# Altium PCB DE-2506241.PcbDoc
Units mm, origin at the board's own origin, x right, y up, seen from the top; angles counter-clockwise.
Board outline 75 x 75 mm, 2 copper layers (Top Layer, Bottom Layer); 68 components, 45 nets, 184 pads, 5 vias.
Unrouted connection lines stored in the file: 49.
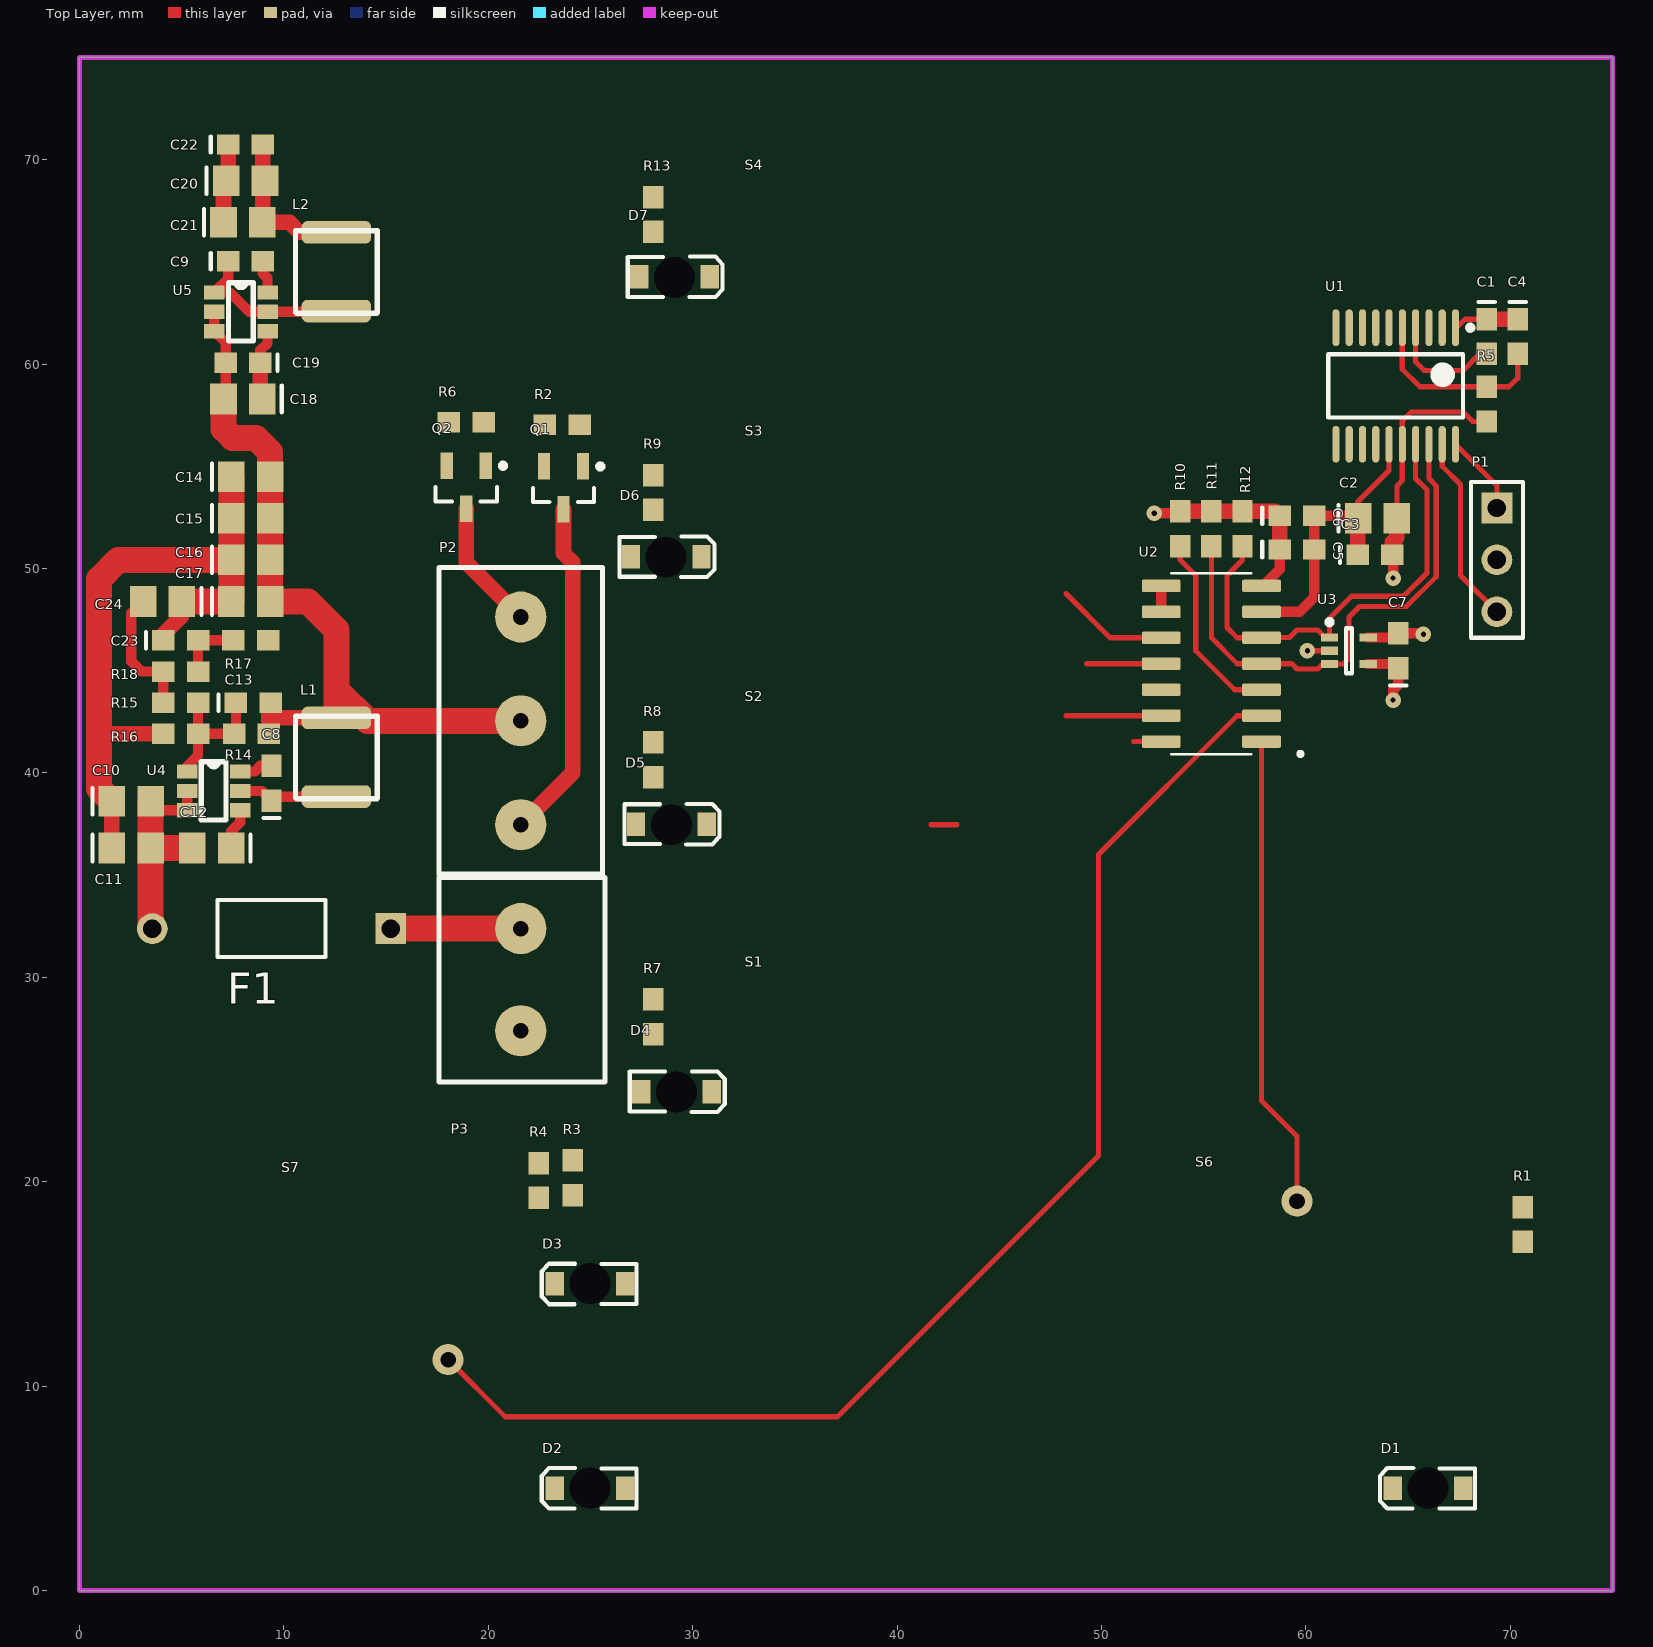
[diagram p0: Top Layer view]
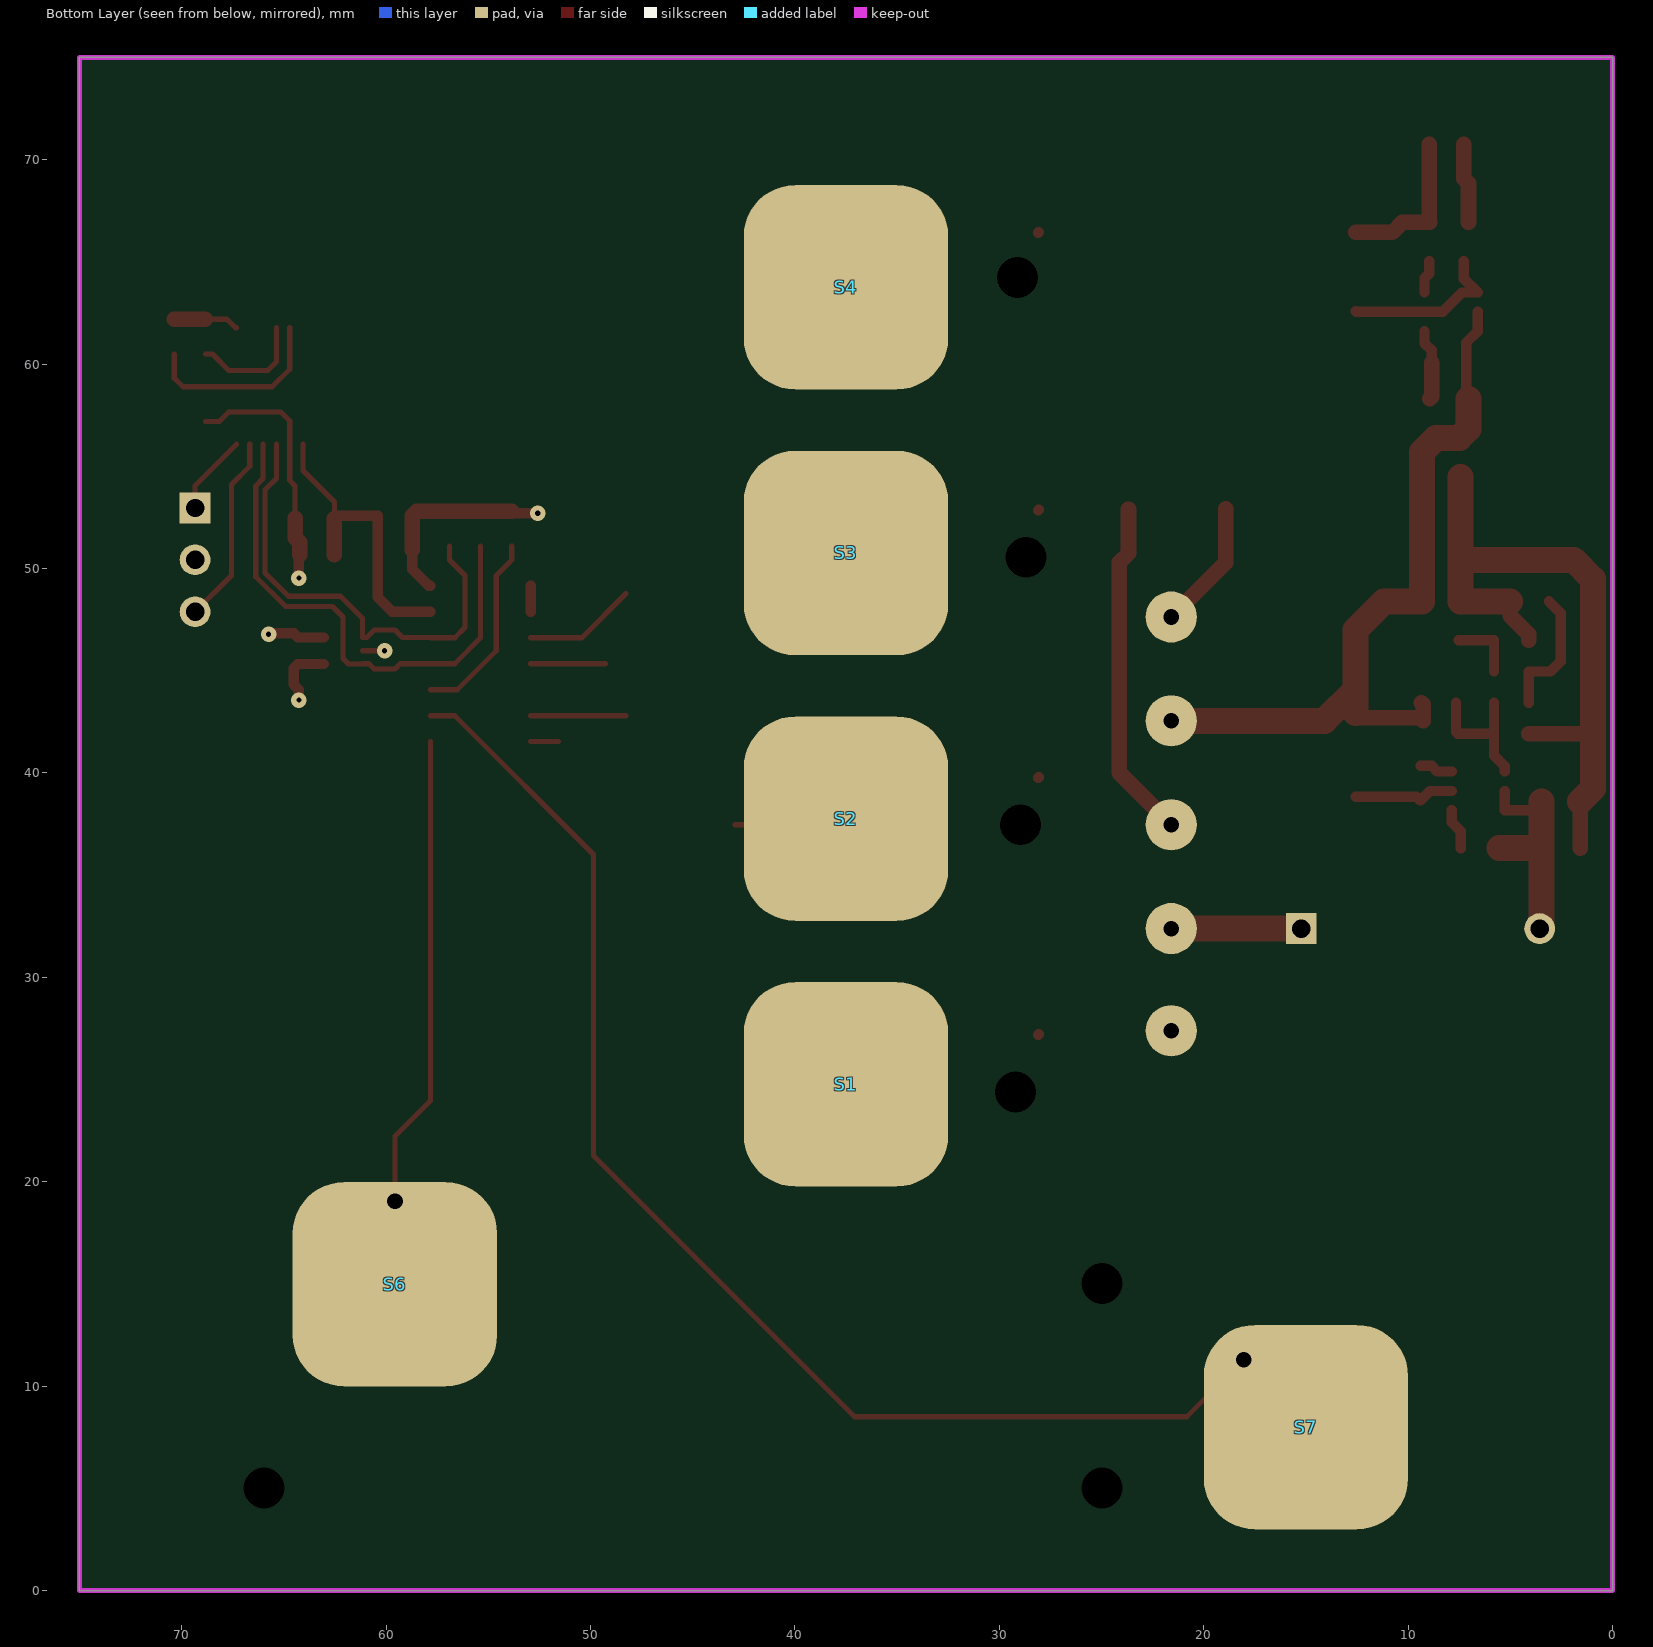
[diagram p1: Bottom Layer view, seen from below]

## Layer stack, top to bottom
Top Solder: solder mask 0.0102, Solder Resist, Dk 3.5
Top Layer: signal copper 0.0356
Dielectric 1: dielectric 0.32, FR-4, Dk 4.8
Bottom Layer: signal copper 0.0356
Bottom Solder: solder mask 0.0102, Solder Resist, Dk 3.5

## Board outline
0,0 0,75 75,75 75,0

## Design rules (kind name [scope] priority, off if disabled: settings)
Clearance [All] p1: gap=0.254 ignorepadtopadclearanceinfootprint=FALSE except(0: Arc-Hole Track-Hole SMDPad-Hole THPad-Hole Via-Hole Fill-Hole Poly-Hole Region-Hole Text-Hole; 0.203: Arc-Arc Arc-Track Arc-SMDPad Track-Track Track-SMDPad SMDPad-SMDPad)
PolygonConnect [All] p1: connectstyle=Relief reliefconductorwidth=0.254 reliefentries=4 polygonreliefangle="90 Angle" airgapwidth=0.254
RoutingVias [All] p1: holewidth=0.711 width=1.27 viastyle="Through Hole" minholewidth=0.711 minwidth=1.27 maxholewidth=0.711 maxwidth=1.27
SolderMaskExpansion [All] p1: expansion=0.102
Width [All] p1: maxlimit=2.54 minlimit=0.254 preferedwidth=0.508
30 further rules are at their usual default settings.

## Components (designator, comment, footprint, x,y, rotation, side; value= is the part's Value field where it differs from the comment)
C1 "C0603" 0603 68.834,61.341 r270 top value=100nF
C2 "C0805" 0805 63.5,52.451 r0 top value=10uF
C3 "C0603" 0603 63.373,50.673 r0 top value=100nF
C4 "C0603" 0603 70.358,61.341 r270 top value=100nF
C5 "C0603" 0603 59.563,50.927 r0 top value=1uF
C6 "C0603" 0603 59.563,52.578 r0 top value=100nF
C7 "C0603" 0603 64.516,45.974 r90 top value=100nF
C8 "100nF" 0603 9.398,39.497 r90 top
C9 "100nF" 0603 8.128,65.024 r0 top
C10 "C0805" 0805 2.54,38.608 r0 top value=22uF
C11 "C0805" 0805 2.54,36.322 r0 top value=22uF
C12 "C0805" 0805 6.477,36.322 r180 top value=22uF
C13 "C0603" 0603 8.509,43.434 r0 top value=100pF
C14 "C0805" 0805 8.382,54.483 r0 top value=22uF
C15 "C0805" 0805 8.382,52.451 r0 top value=22uF
C16 "C0805" 0805 8.382,50.419 r0 top value=22uF
C17 "C0805" 0805 8.382,48.387 r0 top value=22uF
C18 "C0805" 0805 8.001,58.293 r180 top value=22uF
C19 "C0603" 0603 8.001,60.071 r180 top value=100nF
C20 "C0805" 0805 8.128,68.961 r0 top value=22uF
C21 "C0805" 0805 8.001,66.929 r0 top value=22uF
C22 "C0603" 0603 8.128,70.739 r0 top value=100nF
C23 "C0603" 0603 4.953,46.482 r0 top value=100nF
C24 "C0805" 0805 4.064,48.387 r180 top value=10uF
D1 "LED_ON_OFF" "LED sa rupom" 66,5 r180 top locked
D2 "LED_HREC" "LED sa rupom" 25,5 r180 top locked
D3 "LED_VENT" "LED sa rupom" 25,15 r180 top locked
D4 "LED_SPEED_4" "LED sa rupom" 29.185,24.409 r0 top
D5 "LED_SPEED_3" "LED sa rupom" 28.931,37.49 r0 top
D6 "LED_SPEED_2" "LED sa rupom" 28.677,50.571 r0 top
D7 "LED_SPEED_1" "LED sa rupom" 29.083,64.262 r0 top
F1 "Fuse Thermal" PIN-W2/E2.8 9.398,32.385 r180 top
L1 "ASPI-4030S" ASPI-4030S 12.573,40.767 r180 top
L2 "ASPI-4030S" ASPI-4030S 12.573,64.516 r180 top
P1 "ICSP" HDR1X3 69.342,52.959 r270 top
P2 "RS485" "TERMINAL BLOK 3" 21.59,42.545 r0 top
P3 "DC_IN" "TERMINAL BLOK 2" 21.59,29.885 r0 top
Q1 "BSS123" SOT23_N 23.683,53.941 r270 top
Q2 "BSS123" SOT23_N 18.923,53.975 r270 top
R1 "470R" ERA-0603 70.612,17.907 r270 top
R2 "10K" ERA-0603 23.622,57.023 r0 top
R3 "470R" ERA-0603 24.13,20.193 r270 top
R4 "470R" ERA-0603 22.479,20.066 r270 top
R5 "10R" ERA-0603 68.834,58.039 r90 top
R6 "10K" ERA-0603 18.923,57.15 r0 top
R7 "470R" ERA-0603 28.067,28.067 r270 top
R8 "470R" ERA-0603 28.067,40.64 r270 top
R9 "470R" ERA-0603 28.067,53.721 r270 top
R10 "10K" ERA-0603 53.848,51.943 r90 top
R11 "10K" ERA-0603 55.372,51.943 r90 top
R12 "10K" ERA-0603 56.896,51.943 r90 top
R13 "470R" ERA-0603 28.067,67.31 r270 top
R14 "NF" ERA-0603 8.421,41.91 r180 top
R15 "NF" ERA-0603 4.953,43.434 r180 top
R16 "NF" ERA-0603 4.953,41.91 r0 top
R17 "1K" ERA-0603 8.382,46.482 r180 top
R18 "10K" ERA-0603 4.953,44.958 r180 top
S1 "SENS_SPEED_1" SENSOR_PAD#1 38.862,24.765 r0 top
S2 "SENS_SPEED_2" SENSOR_PAD#2 37.719,37.98 r0 top
S3 "SENS_SPEED_3" SENSOR_PAD#1 38.862,50.758 r0 top
S4 "SENS_SPEED_4" SENSOR_PAD#3 38.608,63.754 r0 top
S6 "SENS_ON_OFF" SENSOR_PAD#4 59.563,14.986 r0 top
S7 "SENS_MODE" SENSOR_PAD#5 14.859,14.732 r0 top
U1 "STM32F030F4P6" STM-TSSOP20_N 64.389,58.928 r270 top
U2 "CAP1298" SOIC14 55.372,45.339 r180 top
U3 "24FC01T-I/OT" SC70-LT5_N 62.103,45.974 r0 top
U4 "AP63200" TSOT-26 5.274,40.066 r0 top
U5 "AP63203" TSOT-26 6.604,63.5 r0 top

## Footprints (in the part's own frame and the unit in brackets; to place one, negate y for a bottom-side part, rotate by r counter-clockwise, add the part's x,y. Pads: shape width x height; smd on the part's side, far side on the other; paste and mask are expansions set on the pad)
0603 [mm] "Chip Capacitor; Body 1.6 x 0.8 mm (LxW typ)"
  rect 1.1x1 smd: 1(-0.85,0) 2(0.85,0)
  silkscreen extent -1.7,-0.4 -1.7,0.4
0805 [mm] "Chip Capacitor; Body 2.0 x 1.2 mm (LxW typ)"
  rect 1.3x1.5 smd: 1(-0.95,0) 2(0.95,0)
  silkscreen extent -1.9,-0.65 -1.9,0.65
ASPI-4030S [mm] "SMD Inductor ASPI-4030S"
  rrect50% 3.4x1.1 smd: 1(0,1.925) 2(0,-1.925)
  silkscreen extent -2.01,-2.01 2,2.03, body extent -2.11,-2.13 2.11,2.16, height 3
ERA-0603 [mm] "Chip Resistor; Body 1.6 x 0.8 mm (LxW typ)"
  rect 1.1x1 smd: 1(-0.85,0) 2(0.85,0)
HDR1X3 [mm] "Connector; Header; 3 Position"
  rect 1.5x1.5 hole 0.9: 1(0,0)
  round 1.5 hole 0.9: 2(2.54,0) 3(5.08,0)
  silkscreen extent -1.27,-1.27 6.35,1.27
"LED sa rupom" [mm] "SM LED; 2 Flat Leads"
  rect 0.9x1.15 smd: 1(-1.702,0) 2(1.753,0)
  round 0 hole 2: ""(0.025,-0.025)
  silkscreen extent -2.26,-0.99 2.38,0.99
PIN-W2/E2.8 [mm] "Thru-Hole; 2 Leads"
  rect 1.5x1.5 hole 0.9: 1(-5.825,0)
  round 1.5 hole 0.9: 2(5.825,0)
  silkscreen extent -2.65,-1.4 2.65,1.4
SC70-LT5_N [mm] "SOT353, 5-Leads, Body 2x1.3mm, Pitch 0.65mm, Lead Span 2.1mm, IPC Medium Density"
  rect 0.85x0.4 smd: 1(-0.95,0.65) 2(-0.95,0) 3(-0.95,-0.65) 4(0.95,-0.65) 5(0.95,0.65)
  silkscreen extent -1.07,-1.1 0.15,1.52, body extent -0.7,-1.1 0.7,1.1, height 1.1
SENSOR_PAD#1 [mm] "pcb trace touch sensor pad"
  rrect50% 10x10 smd far side: 1(-1.362,0)
SENSOR_PAD#2 [mm] "pcb trace touch sensor pad"
  rrect50% 10x10 smd far side: 1(-0.219,-0.219)
SENSOR_PAD#3 [mm] "pcb trace touch sensor pad"
  rrect50% 10x10 smd far side: 1(-1.108,0)
SENSOR_PAD#4 [mm] "pcb trace touch sensor pad"
  rrect50% 10x10 smd far side: 1(0,0)
SENSOR_PAD#5 [mm] "pcb trace touch sensor pad"
  rrect50% 10x10 smd far side: 1(0.141,-6.732)
SOIC14 [mm]
  rrect25% 1.9x0.6 smd: 1(-2.455,3.81) 2(-2.455,2.54) 3(-2.455,1.27) 4(-2.455,0) 5(-2.455,-1.27) 6(-2.455,-2.54) 7(-2.455,-3.81) 8(2.455,-3.81) 9(2.455,-2.54) 10(2.455,-1.27) 11(2.455,0) 12(2.455,1.27) 13(2.455,2.54) 14(2.455,3.81)
  silkscreen extent -4.45,-4.43 1.95,4.51, body extent -3,-4.33 3,4.33, height 1.75
SOT23_N [mm] "SOT23, 3-Leads, Body 2.9x1.3mm, Pitch 0.95mm, Lead Span 2.3mm, IPC Medium Density"
  rect 1.3x0.6 smd: 1(-1.05,0.95) 2(-1.05,-0.95) 3(1.05,0)
  silkscreen extent -1.17,-1.5 0.7,1.93, body extent -0.7,-1.5 0.7,1.5, height 1.1
STM-TSSOP20_N [mm] "SOP, 20-Leads, Body 6.6x4.5mm, Pitch 0.65mm, IPC Medium Density"
  oval 1.8x0.35 smd: 1(-2.85,2.925) 2(-2.85,2.275) 3(-2.85,1.625) 4(-2.85,0.975) 5(-2.85,0.325) 6(-2.85,-0.325) 7(-2.85,-0.975) 8(-2.85,-1.625) 9(-2.85,-2.275) 10(-2.85,-2.925) 11(2.85,-2.925) 12(2.85,-2.275) 13(2.85,-1.625) 14(2.85,-0.975) 15(2.85,-0.325) 16(2.85,0.325) 17(2.85,0.975) 18(2.85,1.625) 19(2.85,2.275) 20(2.85,2.925)
  silkscreen extent -2.97,-3.3 1.55,3.78, body extent -2.25,-3.3 2.25,3.3, height 1.2
"TERMINAL BLOK 2" [mm] "Terminal blok 3,5mm"
  round 2.5 hole 0.762: 1(0,-2.5) 2(0,2.5)
  silkscreen extent -4,-5 4.13,5
"TERMINAL BLOK 3" [mm] "Terminal blok konektor 3 pina"
  round 2.5 hole 0.762: 1(0,5.08) 2(0,0) 3(0,-5.08)
  silkscreen extent -4,-7.5 4,7.5
TSOT-26 [mm]
  rect 1x0.7 smd: 1(0,0) 2(0,-0.95) 3(0,-1.9) 4(2.6,-1.9) 5(2.6,-0.95) 6(2.6,0)
  silkscreen extent 0.69,-2.38 1.91,0.48, body extent 0.53,-2.51 2.03,0.61, height 1

## Part data
C1 C2 C3 C4 C5 C6 C7 C10 C11 C12 C13 C14 C15 C16 C17 C18 C19 C20 C21 C22 C23 C24: "Ceramic Chip Capacitor - Standard", PackageDocument=Mar-2001, ComponentLink1Description="Manufacturer Link", ComponentLink1URL=http://www.kemet.com/, ComponentLink2Description=Datasheet, ComponentLink2URL=http://www.kemet.com/kemet/web/homepage/kechome.nsf/vapubfilesname/F3102TA.pdf/$file/F3102TA.pdf, DatasheetDocument=Mar-2001, LatestRevisionDate=19-Mar-2004, LatestRevisionNote="Silkscreen size reduced.", Note="Footprint corresponds to dimensions for bulk cassette packaging. This case size has tightened tolerances.", Published=17-Jul-2002, Publisher="Altium Limited"
  C1 C3 C4 C5 C6 C7 C13 C19 C22 C23: Code_IPC="1608 [0603]", Code_JEITA=0603, PackageReference=0603
  C2 C10 C11 C12 C14 C15 C16 C17 C18 C20 C21 C24: Code_IPC=2012[0805], Code_JEITA=0805, PackageReference=0805
C8 C9: library part C0603, "Ceramic Chip Capacitor - Standard", PackageDocument=Mar-2001, Code_IPC="1608 [0603]", Code_JEITA=0603, ComponentLink1Description="Manufacturer Link", ComponentLink1URL=http://www.kemet.com/, ComponentLink2Description=Datasheet, ComponentLink2URL=http://www.kemet.com/kemet/web/homepage/kechome.nsf/vapubfilesname/F3102TA.pdf/$file/F3102TA.pdf, DatasheetDocument=Mar-2001, LatestRevisionDate=19-Mar-2004, LatestRevisionNote="Silkscreen size reduced.", Note="Footprint corresponds to dimensions for bulk cassette packaging. This case size has tightened tolerances.", PackageReference=0603, Published=17-Jul-2002, Publisher="Altium Limited"
D1 D2 D3 D4 D5 D6 D7: library part HSMC-C540-F0001, "Top Mount AS AlInGaP Red Oval Lens High Brightness", LED_Colour=Red, PackageDocument=30-Apr-2002, ComponentLink1Description="Manufacturer Link", ComponentLink1URL=http://www.agilent.com/, ComponentLink2Description=Datasheet, ComponentLink2URL=http://cp.literature.agilent.com/litweb/pdf/5988-5794EN.pdf, DatasheetDocument=7-Mar-2002, LuminousIntensity="96mcd (Minimum).", PackageReference=2.0X1.25X1.2, PCB_Layout="Complies with manufacturer's recommendation.", Published=11-Dec-2002, Publisher="Altium Limited"
F1: "Thermal Fuse", LatestRevisionDate=17-Jul-2002, LatestRevisionNote="Re-released for DXP Platform.", PackageDescription="Thru-Hole; 2 Leads", PackageReference=PIN-W2/E2.8, Published=24-Mar-1999, Publisher="Altium Limited"
L1 L2: "Wire Wound Magnetically Shielded SMD Power Inductor", Code_IEC=1005, Code_JEITA=0402, LatestRevisionDate=29-May-2009, LatestRevisionNote="IPC-7351 Footprint Added.", PackageDescription="Chip Inductor", PackageReference=0402-A, Published=8-Jun-2000, Publisher="Altium Limited"
P1: library part "Header 3", "Header, 3-Pin", LatestRevisionDate=17-Jul-2002, LatestRevisionNote="Re-released for DXP Platform.", Publisher="Altium Limited"
P2: library part "TERMINAL BLOK 3", "3 pinski terminal blok konektor"
P3: library part "TERMINAL BLOK 2", "Terminal blok konektor 3,5 mm"
Q1 Q2: "N-channel Enhancement Mode Vertical D-MOSFET", ComponentLink1Description="Manufacturer Link", ComponentLink1URL=http://www.semiconductors.philips.com/, ComponentLink2Description=Datasheet, ComponentLink2URL=http://www.semiconductors.philips.com/acrobat/datasheets/BSS123_3.pdf, DatasheetVersion=Apr-1995, LatestRevisionDate=12-Dec-2006, LatestRevisionNote="IPC-7351 Footprint Added.", PackageDescription="3-Pin SOT-23 Package 0.95 mm Pitch, 2.3 mm Lead Span", PackageReference=SOT23, PackageVersion=May-1999, Published=17-Sep-2003, Publisher="Altium Limited"
R1 R2 R3 R4 R5 R6 R7 R8 R9 R10 R11 R12 R13 R14 R15 R16 R17 R18: library part ERAV, "Metal Film Thermosensitive Chip Resistor, 0.56 Ohm to 10k Ohm Range, 5% Tolerance, 0603 Size, 0.063 W", PackageDocument=Mar-2003, Code_IPC="1608 [0603]", ComponentLink1Description="Manufacturer Link", ComponentLink1URL=http://www.panasonic.com/industrial/components/resistive_products.htm, ComponentLink2Description=Datasheet, ComponentLink2URL=http://www.panasonic.com/industrial/components/pdf/AOF0000CE1.pdf, LatestRevisionDate=19-Mar-2004, LatestRevisionNote="Silkscreen size reduced.", Note="If flow soldering, adjust pad width of PCB Footprint to 0.7 - 0.8 times the width of the resistor.", PackageReference=ERA-0603, Published=17-Dec-2003, Publisher="Altium Limited"
S1 S2 S3 S4 S6 S7: library part "Touch sensor"
U1: "ARM Cortex-M0 32-bit MCU, 16 KB Flash, 4 KB Internal RAM, 15 I/Os, 20-pin TSSOP, -40 to 85 degC, Tube", I/Os (High Current)=15, Operating Frequency(F) (Processor speed) (MHz)=48, Supplier Part Number 1=497-14044-5-ND, Supply Voltage(Vcc) min (V)=2.4, ComponentLink1Description="Manufacturer URL", ComponentLink1URL=http://www.st.com/web/en/home.html, ComponentLink2Description=Datasheet, ComponentLink2URL=http://www.st.com/st-web-ui/static/active/en/resource/technical/document/datasheet/DM00088500.pdf, ComponentLink3Description="Package Specification", ComponentLink3URL=http://www.st.com/st-web-ui/static/active/en/resource/technical/document/datasheet/DM00065136.pdf, Core="ARM Cortex-M0", DatasheetVersion="Rev. 1", FLASH Size (Prog) (kB)=16, Internal RAM Size (kB)=4, Mounting Technology="Surface Mount", PackageDescription="20-Pin Thin Shrink Small Outline Package, 6.5 x 4.4 mm Body, 0.65 mm Pitch", PackageReference=TSSOP20, PackageVersion="Rev. 1, 11/2012", Packing=Tube, PartNumber=STM32F030F4P6, Supplier 1=Digi-Key, Supplier 2=Newark, Supplier 3=Mouser, Supplier Part Number 2=06X3648, Supplier Part Number 3=511-STM32F030F4P6
U2: "8 chanel capacitive sensor ic", Code_IPC=SOIC127P600-16, ComponentLink1Description="Manufacturer Link", ComponentLink1URL=http://www.ti.com/, ComponentLink2Description=Datasheet, ComponentLink2URL=http://www-s.ti.com/sc/ds/sn74hc595.pdf, DatasheetVersion=May-1997, LatestRevisionDate=13-Apr-2006, LatestRevisionNote="IPC-7351 Footprint Added.", PackageDescription="16-Pin Small Outline Integrated Circuit 1.27 mm Pitch", PackageReference=D016, PackageVersion=Jan-1998, Published=8-Jun-2000, Publisher="Altium Limited"
U3: library part 24LC01BHT-I/LT, "1Kbit, 400kHz, 2.5V, I2C Serial EEPROM, 5-Pin SC70, Industrial Temperature, Tape and Reel", Supplier Part Number 1=24LC01BHT-I/LTTR-ND, Code_IPC=SOT353-5, ComponentLink1Description=Datasheet, ComponentLink1URL=http://ww1.microchip.com/downloads/en/DeviceDoc/22104A.pdf, ComponentLink2Description="Packaging Specification", ComponentLink2URL=http://www.microchip.com/stellent/groups/techpub_sg/documents/packagingspec/en012702.pdf, ComponentLink3Description="Microchip.com Home", ComponentLink3URL=http://www.microchip.com/, DatasheetVersion="revA, Sep-2008", PackageDescription="5-Lead Plastic Small Outline Transistor (LT) [SC70]", PackageReference=SC70-LT5, PackageVersion="revBB, Aug-2009", Published=2-Dec-2009, Publisher="Altium Limited", Supplier 1=Digi-Key, Supplier 2=Digi-Key, Supplier 3=Digi-Key, Supplier Part Number 2=24LC01BHT-I/LTCT-ND, Supplier Part Number 3=24LC01BHT-I/LTDKR-ND
U4: "2A synchronous  buck converter"
U5: library part AP63200, "2A synchronous  buck converter"

## Free pads (board coordinates)
  round 1.524 hole 0.762: 7(18.034,11.303) 8(59.563,19.05)

## Via types
v1: diameter 0.762, hole 0.254, Top Layer to Bottom Layer, 5 vias

## Nets (pads, with @x,y where several pads share a name; then routed paths per layer and width w, separated by ;. In a path a pad name is that pad's centre, name@x,y a point inside that pad or via, vN(x,y) a via of type N, cw(c..) or ccw(c..) an arc to the next point about the centre after c; other vN are vias at no path point)
+3V3: C2.2 C3.2 C5.1 C6.1 C7.1 C20.2 C21.2 C22.2 L2.2 R5.1 R10.2 R11.2 R12.2 U1.16 U2.7 U3.4 | length 33.4
  Top Layer w0.254: C2.2 64.45,54.036 64.714,54.3 U1.16 64.714,57.221 65.151,57.658 67.691,57.658 68.16,57.189 R5.1
  Top Layer w0.508: v1(52.578,52.705) 53.76,52.705 R10.2 ; U2.7 57.912,49.149 58.713,49.95 C5.1 ; U3.4 64.316,45.324 C7.1 64.516,44.323 64.262,44.069 v1(64.262,43.561) ; C3.2 64.262,50.634 v1(64.262,49.53)
  Top Layer w0.762: C22.2 8.978,66.956 C21.2 10.287,66.929 10.775,66.441 L2.2 ; R10.2 R11.2 R12.2 58.498,52.793 C6.1 C5.1 ; C3.2 64.223,51.269 64.45,51.496 C2.2
+PWR: C10.2 C11.2 C12.2 F1.2 U4.2 U4.3 | length 11.2
  Top Layer w0.508: C10.2 3.932,38.166 U4.3 U4.2
  Top Layer w1.27: C10.2 C11.2 ; F1.2 3.49,32.468 C11.2 ; C12.2 C11.2
+VREG: C13.2 C14.2 C15.2 C16.2 C17.2 C18.2 C19.2 L1.2 P2.2 R14.1 U5.2 U5.3 | length 37.9
  Top Layer w0.508: U5.2 U5.3 7.151,61.053 C19.2 7.151,58.393 C18.2
  Top Layer w0.762: C13.2 9.271,43.346 9.271,42.545 9.418,42.692 L1.2
  Top Layer w1.27: C18.2 7.051,56.83 7.493,56.388 8.636,56.388 9.332,55.692 C14.2 C15.2 C16.2 C17.2 11.176,48.387 12.573,46.99 12.573,44.069 ; L1.2@12.573,42.926 12.573,44.069 ; P2.2 14.097,42.545 12.573,44.069
ALERT: R10.1 U1.13 U2.3 | length 9.4
  Top Layer w0.254: R10.1 53.848,50.419 54.61,49.657 54.61,45.974 56.515,44.069 U2.3
I2C1_SCL: R12.1 U1.17 U2.5 U3.1 | length 23
  Top Layer w0.254: R12.1 56.896,50.419 56.134,49.657 56.134,47.117 56.642,46.609 U2.5 57.842,46.624 59.197,46.624 59.563,46.99 60.579,46.99 60.945,46.624 U3.1 61.153,47.564 62.23,48.641 64.77,48.641 65.913,49.784 65.913,53.848 65.364,54.397 U1.17
I2C1_SDA: R11.1 U1.18 U2.4 U3.3 | length 25.8
  Top Layer w0.254: R11.1 55.372,46.609 56.642,45.339 U2.4 59.309,45.339 59.563,45.085 60.579,45.085 60.833,45.339 61.138,45.339 U3.3 61.834,45.324 62.103,45.593 62.103,47.625 62.611,48.133 64.909,48.133 66.37,49.595 66.37,54.037 66.014,54.394 U1.18
LED_HREC: R3.1 U1.10
LED_ON_OFF: R1.1 U1.14
LED_SPEED_1: R13.1 U1.6
LED_SPEED_2: R9.1 U1.7
LED_SPEED_3: R8.1 U1.8
LED_SPEED_4: R7.1 U1.9
LED_VENT: R4.1 U1.11
NetC1_2: C1.2 U1.4 | length 5.6
  Top Layer w0.254: U1.4 65.364,60.112 65.786,59.69 67.691,59.69 68.492,60.491 C1.2
NetC4_2: C4.2 R5.2 U1.5 | length 9.4
  Top Layer w0.254: U1.5 64.714,59.746 65.571,58.889 R5.2 69.938,58.889 70.358,59.309 C4.2
NetC8_1: C8.1 L1.1 U4.5 | length 5
  Top Layer w0.508: U4.5 8.929,39.116 C8.1 9.593,38.842 L1.1
NetC8_2: C8.2 U4.6 | length 1.6
  Top Layer w0.508: U4.6 8.57,40.066 8.851,40.347 C8.2
NetC9_1: C9.1 L2.1 U5.1 U5.5 | length 8.2
  Top Layer w0.508: C9.1 7.278,64.174 U5.1 7.366,63.5 8.316,62.55 U5.5 12.532,62.55 L2.1
NetC9_2: C9.2 U5.6 | length 1.6
  Top Layer w0.508: C9.2 8.978,64.428 9.204,64.202 U5.6
NetC13_1: C13.1 R14.2 R15.1 R16.2 U4.1 | length 6.9
  Top Layer w0.508: U4.1 5.274,40.326 5.803,40.855 R16.2 ; R15.1 R16.2 ; C13.1 7.659,41.998 R14.2 R16.2
NetC23_2: C23.2 R17.2 R18.1 | length 3.3
  Top Layer w0.508: R18.1 C23.2 R17.2
NetC24_2: C24.2 R15.2 R18.2 | length 6.5
  Top Layer w0.508: C24.2 2.54,47.813 2.54,45.466 3.048,44.958 R18.2 R15.2
NetD1_1: D1.1 R1.2
NetD2_1: D2.1 R3.2
NetD3_1: D3.1 R4.2
NetD4_1: D4.1 R7.2 | length 0.1
  Top Layer w0.508: R7.2 R7.2@28.103,27.181
NetD5_1: D5.1 R8.2 | length 0.1
  Top Layer w0.508: R8.2 R8.2@28.103,39.754
NetD6_1: D6.1 R9.2 | length 0.1
  Top Layer w0.508: R9.2 R9.2@28.103,52.835
NetD7_1: D7.1 R13.2 | length 0.1
  Top Layer w0.508: R13.2 R13.2@28.103,66.424
NetF1_1: F1.1 P3.2 | length 6.4
  Top Layer w1.27: F1.1 P3.2
NetS1_1: S1.1 U2.14 | length 1.4
  Top Layer w0.254: 51.562,41.529 U2.14
NetS2_1: S2.1 U2.13 | length 5.9
  Top Layer w0.254: 41.656,37.465 42.926,37.465 ; 48.26,42.799 U2.13
NetS3_1: S3.1 U2.11 | length 3.6
  Top Layer w0.254: 49.276,45.339 U2.11
NetS4_1: S4.1 U2.10 | length 5.6
  Top Layer w0.254: 48.26,48.768 50.419,46.609 U2.10
NetS5_1: U2.12
NetS6_1: pad.8 S6.1 U2.1 | length 23.2
  Top Layer w0.254: U2.1 57.827,23.961 59.563,22.225 pad.8
NetS7_1: pad.7 S7.1 U2.2 | length 63.8
  Top Layer w0.254: pad.7 20.828,8.509 37.084,8.509 49.847,21.273 49.847,36.005 56.642,42.799 U2.2
SWCLK: P1.1 U1.20 | length 4
  Top Layer w0.254: U1.20 69.342,54.05 P1.1
SWDIO: P1.3 U1.19 | length 9.3
  Top Layer w0.254: U1.19 66.664,55.002 67.564,54.102 67.564,49.657 P1.3
VENT_1: P2.3 Q1.3 | length 16.7
  Top Layer w0.762: P2.3 24.13,40.005 24.13,50.292 23.683,50.739 Q1.3
VENT_2: P2.1 Q2.3 | length 6.4
  Top Layer w0.762: Q2.3 18.923,50.292 P2.1
VENT_DIR_IN: Q1.1 R2.2 U1.2
VENT_DIR_OUT: Q2.1 R6.2 U1.3
VREG_PWM: R17.1 U1.12
VSS: C1.1 C2.1 C3.1 C4.1 C5.2 C6.2 C7.2 C10.1 C11.1 C12.1 C14.1 C15.1 C16.1 C17.1 C18.1 C19.1 C20.1 C21.1 C22.1 C23.1 C24.1 D1.2 D2.2 D3.2 D4.2 D5.2 D6.2 D7.2 P1.2 P3.1 Q1.2 Q2.2 R2.1 R6.1 R16.1 U1.1 U1.15 U2.6 U2.8 U2.9 U3.2 U3.5 U4.4 U5.4 | length 66.9
  Top Layer w0.254: v1(60.071,45.974) U3.2 ; C2.1@62.523,52.424 62.523,53.252 64.064,54.793 U1.15 ; U1.1 67.366,61.778 67.779,62.191 C1.1
  Top Layer w0.508: C12.1 7.427,37.145 7.874,37.592 U4.4 ; C19.1 8.851,60.667 9.204,61.02 U5.4 ; U2.9 U2.8 ; U2.6 59.69,47.879 60.413,48.602 C5.2 C6.2 C2.1@62.369,52.578 ; U3.5 64.316,46.624 C7.2 65.698,46.824 v1(65.742,46.78)
  Top Layer w0.762: 0.965,41.91 R16.1 ; C11.1 C10.1 ; C23.1 4.103,46.775 5.014,47.686 C24.1 ; C21.1 7.051,68.834 C20.1 7.278,69.061 C22.1 ; C19.1 8.851,58.393 C18.1 ; C3.1 C2.1@62.523,52.424 ; C1.1 C4.1
  Top Layer w1.27: C10.1 0.965,39.233 0.965,41.91 0.965,49.479 1.905,50.419 C16.1 ; C24.1 C17.1 C16.1 ; C14.1 C15.1 C16.1
pads on no net: D1. D2. D3. D4. D5. D6. D7.

## Keep-outs
Keep-Out Layer:
  the board outline again, w0.254

## Silkscreen, mask and mechanical layers (free items; w line width, h text height)
Mechanical 1:
  lines w0.254: 15,15 15,60 60,60 60,15 15,15

## Dimensions
75,75 to 75,0 on Mechanical 1
0,75 to 75,75 on Mechanical 1